# EAGLE board ArduinoISP (EAGLE 6.4)
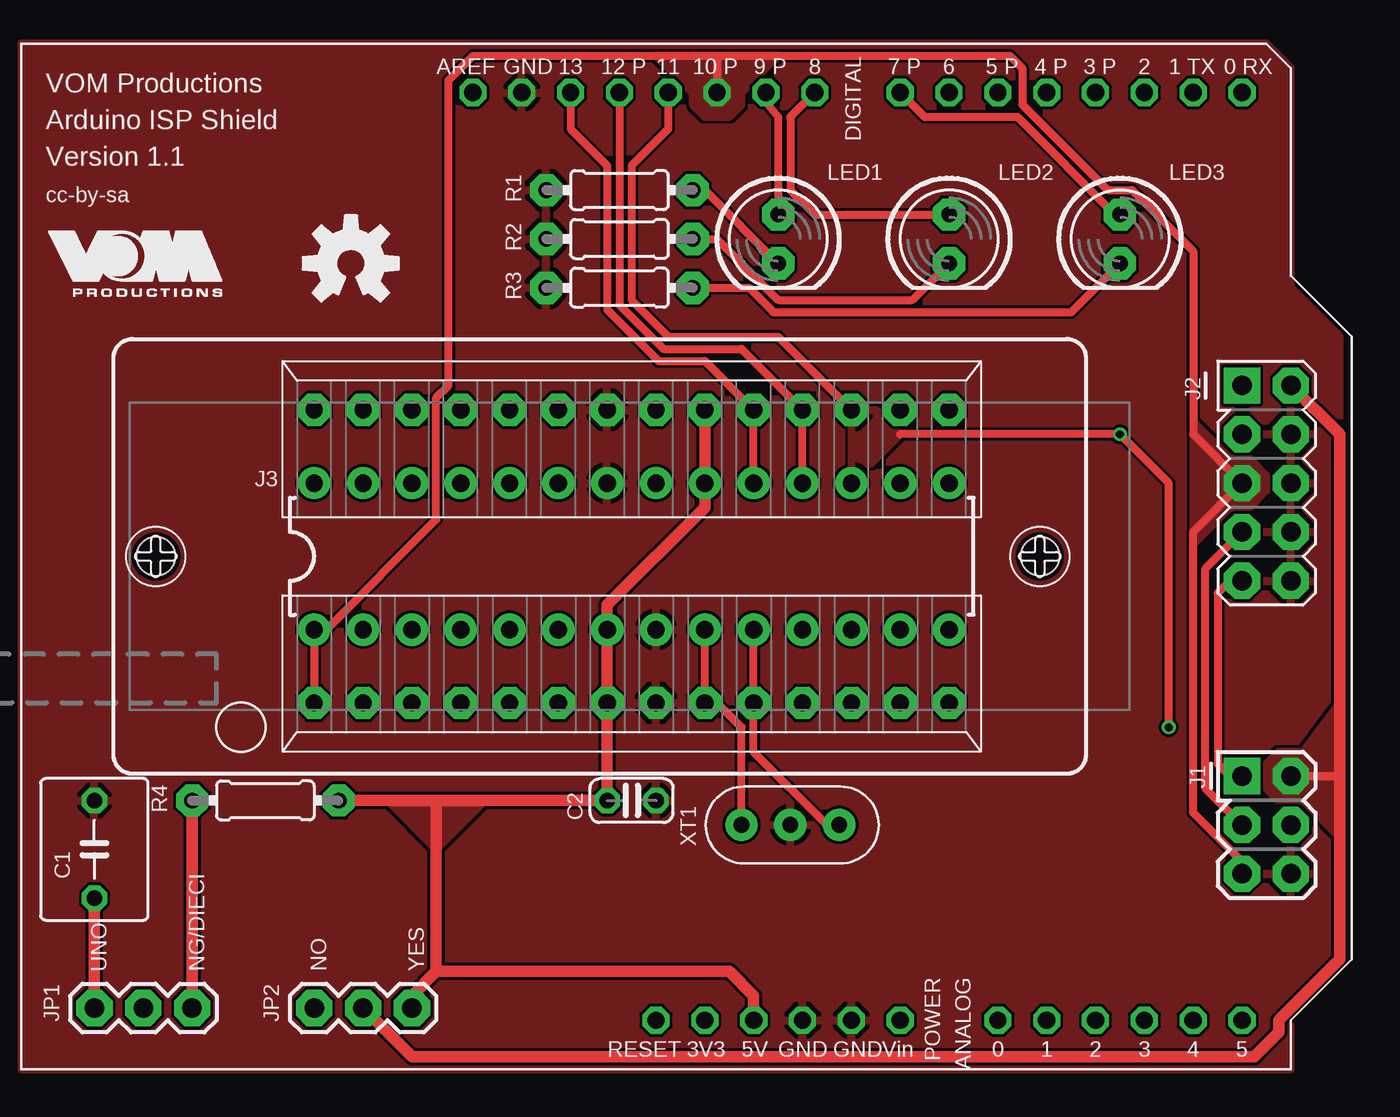
[diagram p0: board, top side]
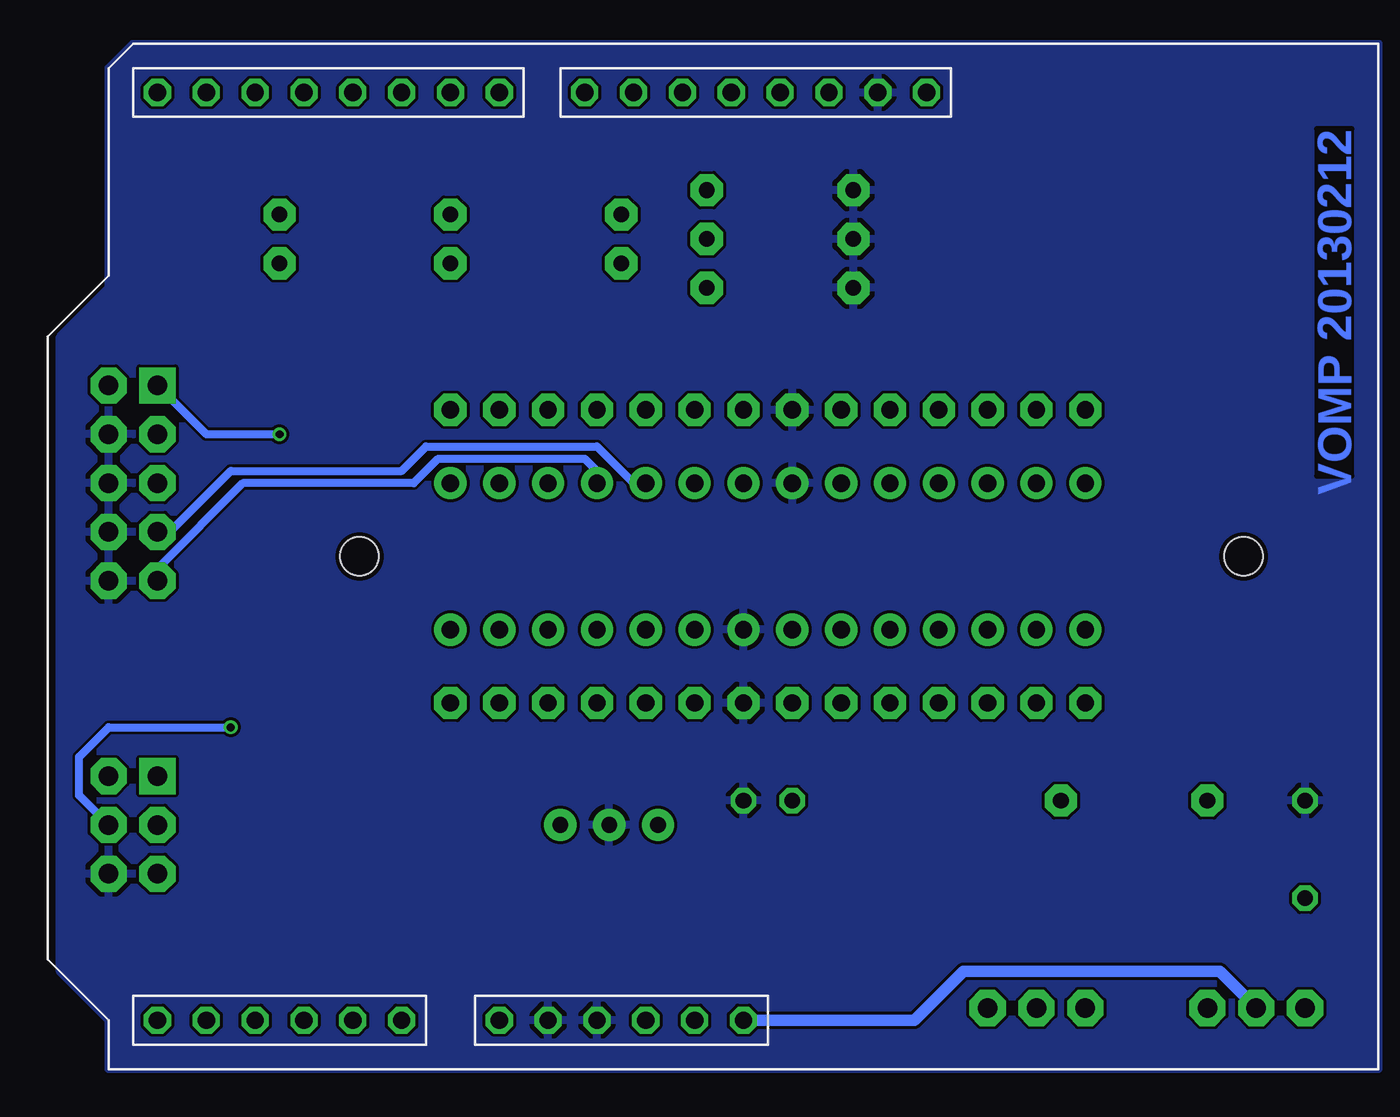
[diagram p1: board, bottom side, seen from below]

No outline drawn. Coordinates in mm, seen from the top.
Copper layers (1*16): Top 0.035mm / dielectric 1.5mm / Bottom 0.035mm
Design rules "Fusion_eagle_rule_v1.1 *": minimum track width 6mil, minimum drill 12mil, track to track 6mil, track to pad 6mil, pad to pad 6mil, via to via 6mil, smd to smd 0mil, copper to edge 10mil, drill to drill 10mil, minimum pad ring 10mil, minimum via ring 6mil, stop-mask expansion 2mil, vias tented up to drill 100mil, thermal gap 10mil

## Footprints (pad centres in the part's own frame; a part is rotated, then mirrored left to right if it is on the bottom)
SHIELD-OCTAGONALPAD = drill 0.9 octagon: 0_RX -25.4,27.94; 1_TX -25.4,25.4; 2 -25.4,22.86; 3 -25.4,20.32; 3V3 22.86,0; 4 -25.4,17.78; 5 -25.4,15.24; 5V 22.86,2.54; 6 -25.4,12.7; 7 -25.4,10.16; 8 -25.4,5.715; 9 -25.4,3.175; 10 -25.4,0.635; 11 -25.4,-1.905; 12 -25.4,-4.445; 13 -25.4,-6.985; A_0 22.86,15.24; A_1 22.86,17.78; A_2 22.86,20.32; A_3 22.86,22.86; A_4 22.86,25.4; A_5 22.86,27.94; AREF -25.4,-12.065; GND0 -25.4,-9.525; GND1 22.86,7.62; GND2 22.86,5.08; RESET 22.86,-2.54; VIN 22.86,10.16
C050-055X075 = drill 0.813 octagon: 1 -2.54,0; 2 2.54,0
C025-024X044 = drill 0.813 octagon: 1 -1.27,0; 2 1.27,0
2X3-NS = drill 1.016 pad 1.88 square: 1 -2.54,-1.27 | drill 1.016 pad 1.88 octagon: 2 -2.54,1.27; 3 0,-1.27; 4 0,1.27; 5 2.54,-1.27; 6 2.54,1.27
AVR_ICSP = drill 1.016 pad 1.88 square: 1 -1.27,5.08 | drill 1.016 pad 1.88 octagon: 2 1.27,5.08; 3 -1.27,2.54; 4 1.27,2.54; 5 -1.27,0; 6 1.27,0; 7 -1.27,-2.54; 8 1.27,-2.54; 9 -1.27,-5.08; 10 1.27,-5.08
DIL28-3-ZIF_SOCKET = drill 0.9 pad 1.676: 1 -16.51,-3.81; 2 -13.97,-3.81; 3 -11.43,-3.81; 4 -8.89,-3.81; 5 -6.35,-3.81; 6 -3.81,-3.81; 7 -1.27,-3.81; 8 1.27,-3.81; 9 3.81,-3.81; 10 6.35,-3.81; 11 8.89,-3.81; 12 11.43,-3.81; 13 13.97,-3.81; 14 16.51,-3.81; 15 16.51,3.81; 16 13.97,3.81; 17 11.43,3.81; 18 8.89,3.81; 19 6.35,3.81; 20 3.81,3.81; 21 1.27,3.81; 22 -1.27,3.81; 23 -3.81,3.81; 24 -6.35,3.81; 25 -8.89,3.81; 26 -11.43,3.81; 27 -13.97,3.81; 28 -16.51,3.81
1X03 = drill 1.016 pad 1.88 octagon: 1 0,0; 2 2.54,0; 3 5.08,0
LED5MM = drill 0.813 pad 1.676 octagon: A -1.27,0; K 1.27,0
0204/7 = drill 0.813 pad 1.676 octagon: 1 -3.81,0; 2 3.81,0
CERM_OSC = drill 0.813 pad 1.676: P$1 -2.54,0; P$2 0,0; P$3 2.54,0
228-1277-00-0602J = drill 0.9 pad 1.676 octagon: 1 -16.51,-7.62; 2 -13.97,-7.62; 3 -11.43,-7.62; 4 -8.89,-7.62; 5 -6.35,-7.62; 6 -3.81,-7.62; 7 -1.27,-7.62; 8 1.27,-7.62; 9 3.81,-7.62; 10 6.35,-7.62; 11 8.89,-7.62; 12 11.43,-7.62; 13 13.97,-7.62; 14 16.51,-7.62; 15 16.51,7.62; 16 13.97,7.62; 17 11.43,7.62; 18 8.89,7.62; 19 6.35,7.62; 20 3.81,7.62; 21 1.27,7.62; 22 -1.27,7.62; 23 -3.81,7.62; 24 -6.35,7.62; 25 -8.89,7.62; 26 -11.43,7.62; 27 -13.97,7.62; 28 -16.51,7.62 | hole 2: 21.24,0; -24.74,0

## Placement (x,y rotation side)
BD1  ARDUINO-USBOCTAGONAL_PADS  [SHIELD-OCTAGONALPAD]  35.56,25.4 270 top
C1  10µF  [C050-055X075]  3.81,11.43 90 top
C2  0.1µF  [C025-024X044]  31.75,13.97 0 top
J1  ICSP 6  [2X3-NS]  64.77,12.7 270 top
J2  ICSP 10  [AVR_ICSP]  64.77,30.48 0 top
J3  ATMEGAxx8 ZIF SOCKET  [DIL28-3-ZIF_SOCKET]  31.75,26.67 0 top
JP1  AUTO RESET  [1X03]  3.81,3.17 0 top
JP2  TARGET POWER  [1X03]  15.24,3.17 0 top
LED1  RUNNING  [LED5MM]  39.37,43.18 270 top
LED2  ERROR  [LED5MM]  48.26,43.18 270 top
LED3  PROGRAM  [LED5MM]  57.15,43.18 270 top
R1  100Ω  [0204/7]  31.11,45.72 180 top
R2  100Ω  [0204/7]  31.11,43.18 180 top
R3  68Ω  [0204/7]  31.11,40.64 180 top
R4  120Ω  [0204/7]  12.7,13.97 180 top
U$1  [VOMPLOGO]  1.27,40.01 0 top
U$2  OSHW-LOGOM  [OSHW-LOGO-M]  17.14,41.91 0 top
XT1  [CERM_OSC]  40.01,12.7 0 top
ZX1  228-1277-00-0602J  [228-1277-00-0602J]  31.75,26.67 0 top

## Library data of the parts
BD1 = Arduino-Various
C1 C2 = resistor
J1-J3 JP1 JP2 U$2 = SparkFun
LED1-LED3 R1-R4 XT1 = adafruit
U$1 = VOM Productions
ZX1 = con-3m; MF: 3M; MPN: 228-1277-00-0602J; OC_FARNELL: 9897356; OC_NEWARK: 85K7825

## Nets
3V3: BD1.3V3
5V: BD1.5V C2.1 J3.7 J3.20 JP2.3 R4.1 ZX1.7 ZX1.20
5V_COND: J1.2 J2.2 JP2.2
ERRLED: BD1.8 LED2.A
ERRLEDCATH: LED2.K R2.1
GND: BD1.GND0 BD1.GND1 BD1.GND2 C1.2 C2.2 J1.6 J2.4 J2.6 J2.8 J2.10 J3.8 J3.22 R1.2 R2.2 R3.2 XT1.P$2 ZX1.8 ZX1.22
MISO: BD1.12 J1.1 J2.9 J3.18 ZX1.18
MOSI: BD1.11 J1.4 J2.1 J3.17 ZX1.17
NG_AR_FIX: JP1.3 R4.2
PRGLED: BD1.7 LED3.A
PRGLEDCATH: LED3.K R3.1
RESET: BD1.RESET JP1.2
RUNLED: BD1.9 LED1.A
RUNLEDCATH: LED1.K R1.1
SCK: BD1.13 J1.3 J2.7 J3.19 ZX1.19
TGT_RST: BD1.10 J1.5 J2.5 J3.1 ZX1.1
UNO_AR_FIX: C1.1 JP1.1
VIN: BD1.VIN
XTAL1: J3.9 XT1.P$1 ZX1.9
XTAL2: J3.10 XT1.P$3 ZX1.10

## Tracks (layer width: path | path; a pad name or v marks a point on that pad's centre or on a via)
5V
  Top 0.61: JP2.3 20.32,3.81 21.59,5.08 | BD1.5V 38.1,3.81 36.83,5.08 21.59,5.08 | R4.1 21.59,13.97 | 21.59,13.97 C2.1 ZX1.7 J3.7 30.48,24.13 35.56,29.21 J3.20 ZX1.20 | 21.59,5.08 21.59,13.97
  pour Top: 21.59,11.43 24.13,13.97 19.05,13.97
5V_COND
  Top 0.406: J1.2 68.58,15.24
  Top 0.61: J2.2 68.58,33.02 68.58,15.24 68.58,5.71 65.41,2.54 65.41,1.91 64.14,0.64 20.32,0.64 JP2.2
  pour Top (no thermals): 68.58,12.06 68.58,19.05 66.67,16.51 65.41,16.51 64.77,15.88 64.77,14.61 65.41,13.97 66.67,13.97
ERRLED
  Top 0.406: BD1.8 40.01,49.53 40.01,45.72 41.27,44.45 LED2.A
ERRLEDCATH
  Top 0.406: R2.1 36.2,43.18 39.37,40.01 46.35,40.01 LED2.K
GND
  pour Top (rank 2): 0,53.34 0,0 66.04,0 66.04,2.54 68.58,5.08 68.58,38.1 66.04,40.64 66.04,52.07 64.77,53.34
  pour Bottom (rank 2): 0,53.34 0,0 66.04,0 66.04,2.54 68.58,5.08 68.58,38.1 66.04,40.64 66.04,52.07 64.77,53.34
MISO
  Top 0.406: J3.18 ZX1.18 37.47,37.47 33.4,37.47 31.11,39.75 BD1.12 | J2.9 62.87,25.4 62.23,24.77 62.23,15.88 62.87,15.24 J1.1
  Bottom 0.406: J2.9 63.5,26.04 59.05,30.48 50.16,30.48 48.9,31.75 41.27,31.75 40.64,31.11 J3.18
MOSI  (via drill 0.41)
  Top 0.406: 45.72,33.02 v57.15,33.02 59.69,30.48 v59.69,17.78 | BD1.11 33.66,48.9 31.75,46.99 31.75,40.01 33.66,38.1 39.37,38.1 ZX1.17
  Bottom 0.406: J2.1 60.96,33.02 v57.15,33.02 | J1.4 67.58,14.24 67.58,16.24 66.04,17.78 v59.69,17.78
  pour Top: 43.18,34.29 43.18,30.48 45.72,33.02 44.45,34.29
NG_AR_FIX
  Top 0.61: JP1.3 R4.2
PRGLED
  Top 0.406: BD1.7 46.99,49.53 51.82,49.53 56.9,44.45 LED3.A
PRGLEDCATH
  Top 0.406: R3.1 37.85,40.64 39.12,39.37 54.61,39.37 LED3.K
RESET
  Bottom 0.61: BD1.RESET 24.13,2.54 21.59,5.08 8.26,5.08 JP1.2
RUNLED
  Top 0.406: BD1.9 38.73,50.29 39.37,49.53 LED1.A
RUNLEDCATH
  Top 0.406: R1.1 35.56,45.72 LED1.K
SCK
  Top 0.406: J3.19 ZX1.19 35.56,36.83 33.15,36.83 30.48,39.5 30.48,46.99 28.57,48.9 BD1.13 | J1.3 61.59,14.61 61.59,26.04 J2.7
  Bottom 0.406: J2.7 62.87,27.94 59.69,31.11 50.8,31.11 49.53,32.38 40.64,32.38 38.73,30.48 J3.19
TGT_RST
  Top 0.406: 36.2,52.7 51.44,52.7 52.07,52.07 52.07,50.16 56.52,45.72 57.78,45.72 60.96,42.55 60.96,33.02 J2.5 60.96,27.94 60.96,13.34 63.5,10.79 J1.5 | 36.2,52.7 BD1.10 | 36.2,52.7 23.5,52.7 22.23,51.44 22.23,35.56 21.59,34.92 21.59,28.57 15.88,22.86 J3.1 ZX1.1
  pour Top (no thermals): 60.96,33.66 60.96,27.3 62.87,29.21 63.87,29.21 64.77,30.11 64.77,30.85 63.87,31.75 62.87,31.75
  pour Top (no thermals): 34.92,50.8 34.92,50.16 35.56,49.53 36.83,49.53 37.47,50.16 37.47,50.8 39.37,52.7 33.02,52.7
UNO_AR_FIX
  Top 0.61: JP1.1 C1.1
XTAL1
  Top 0.406: XT1.P$1 37.47,17.78 36.2,19.05 ZX1.9 J3.9
XTAL2
  Top 0.406: XT1.P$3 41.91,12.7 38.1,16.51 ZX1.10 J3.10

## Text on the board
Bottom: VOMP 20130212
_tsilk: VOM Productions | Arduino ISP Shield | Version 1.1 | cc-by-sa | UNO | NG/DIECI | NO | YES